# Altium PCB PCB 380.PcbDoc
Units mil, origin at the board's own origin, x right, y up, seen from the top; angles counter-clockwise.
Board outline 3250 x 4050 mil, 2 copper layers (Top Layer, Bottom Layer); 45 components, 47 nets, 207 pads, 18 vias.
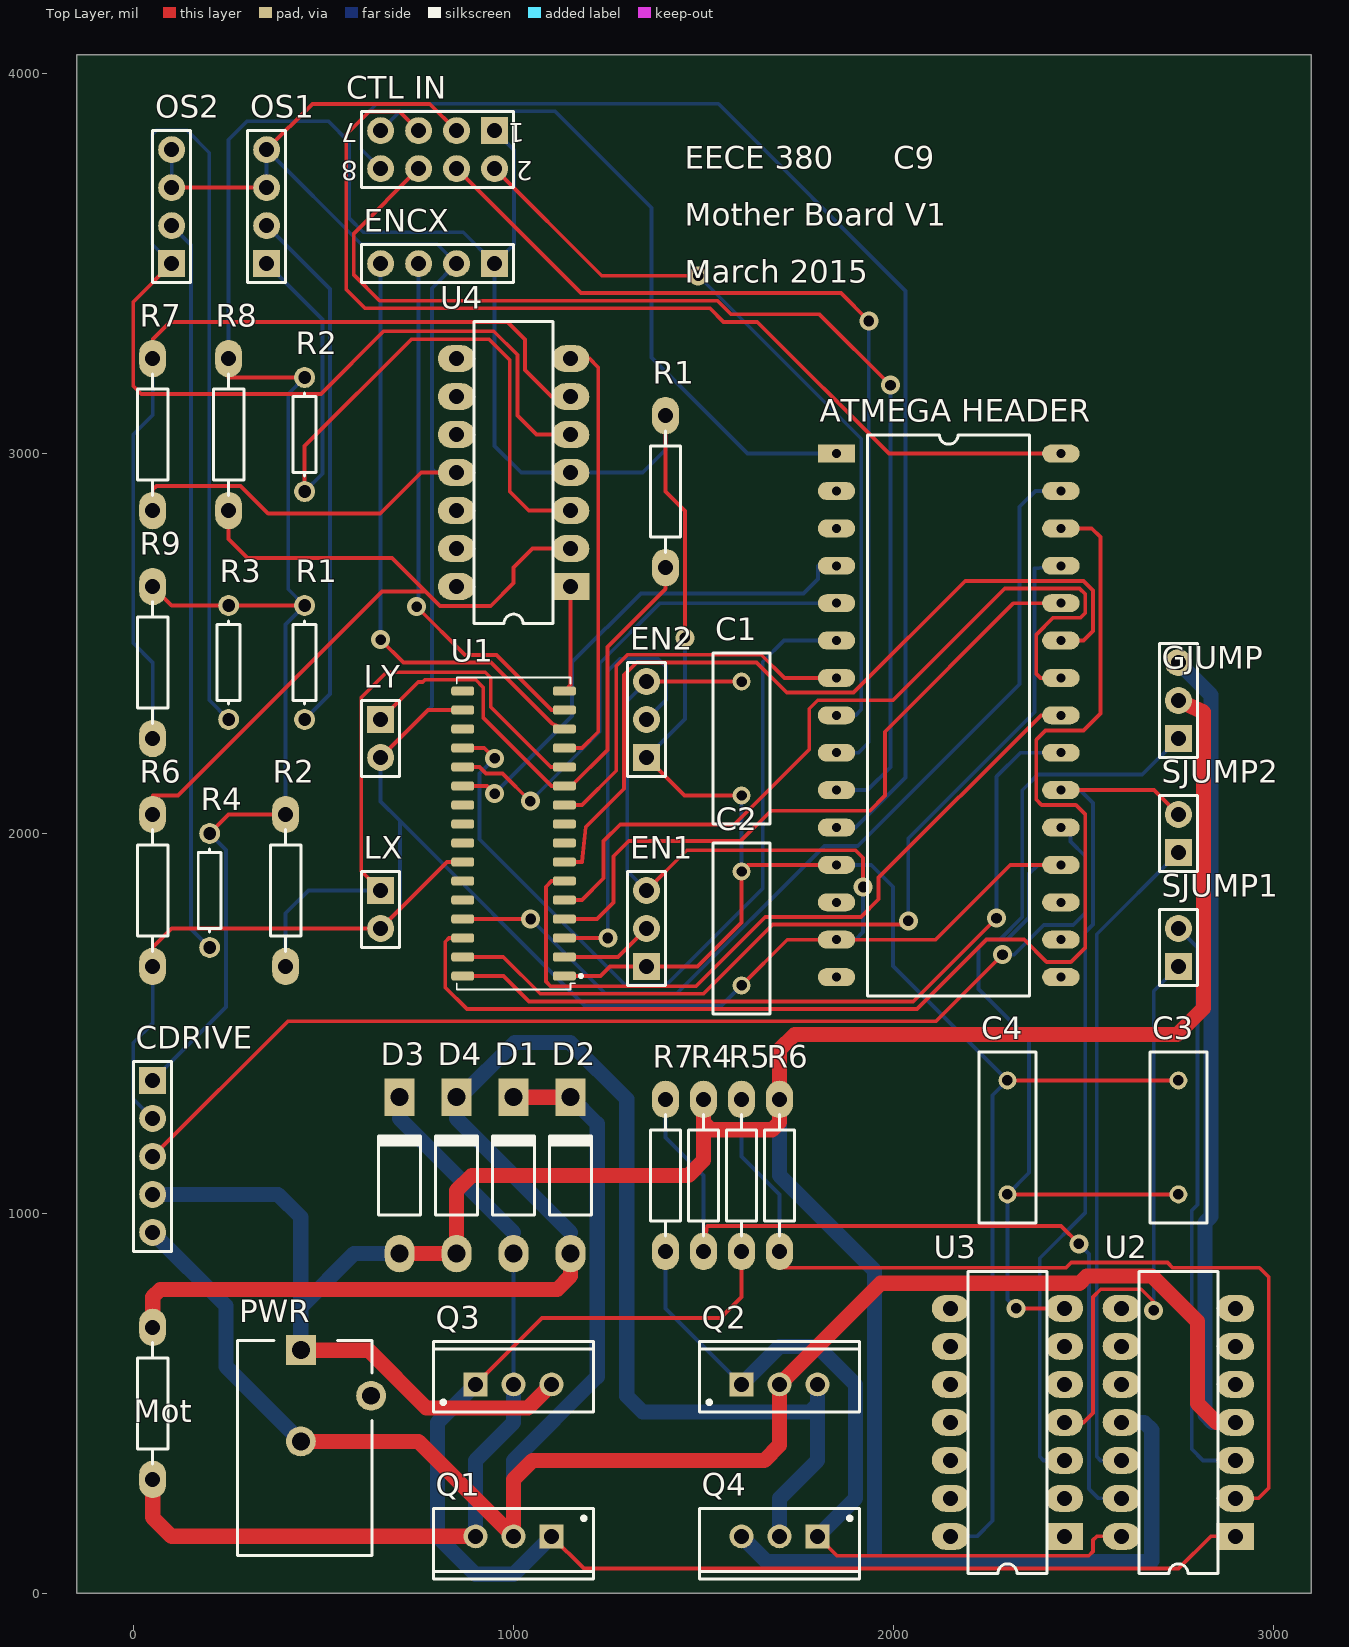
[diagram p0: Top Layer view]
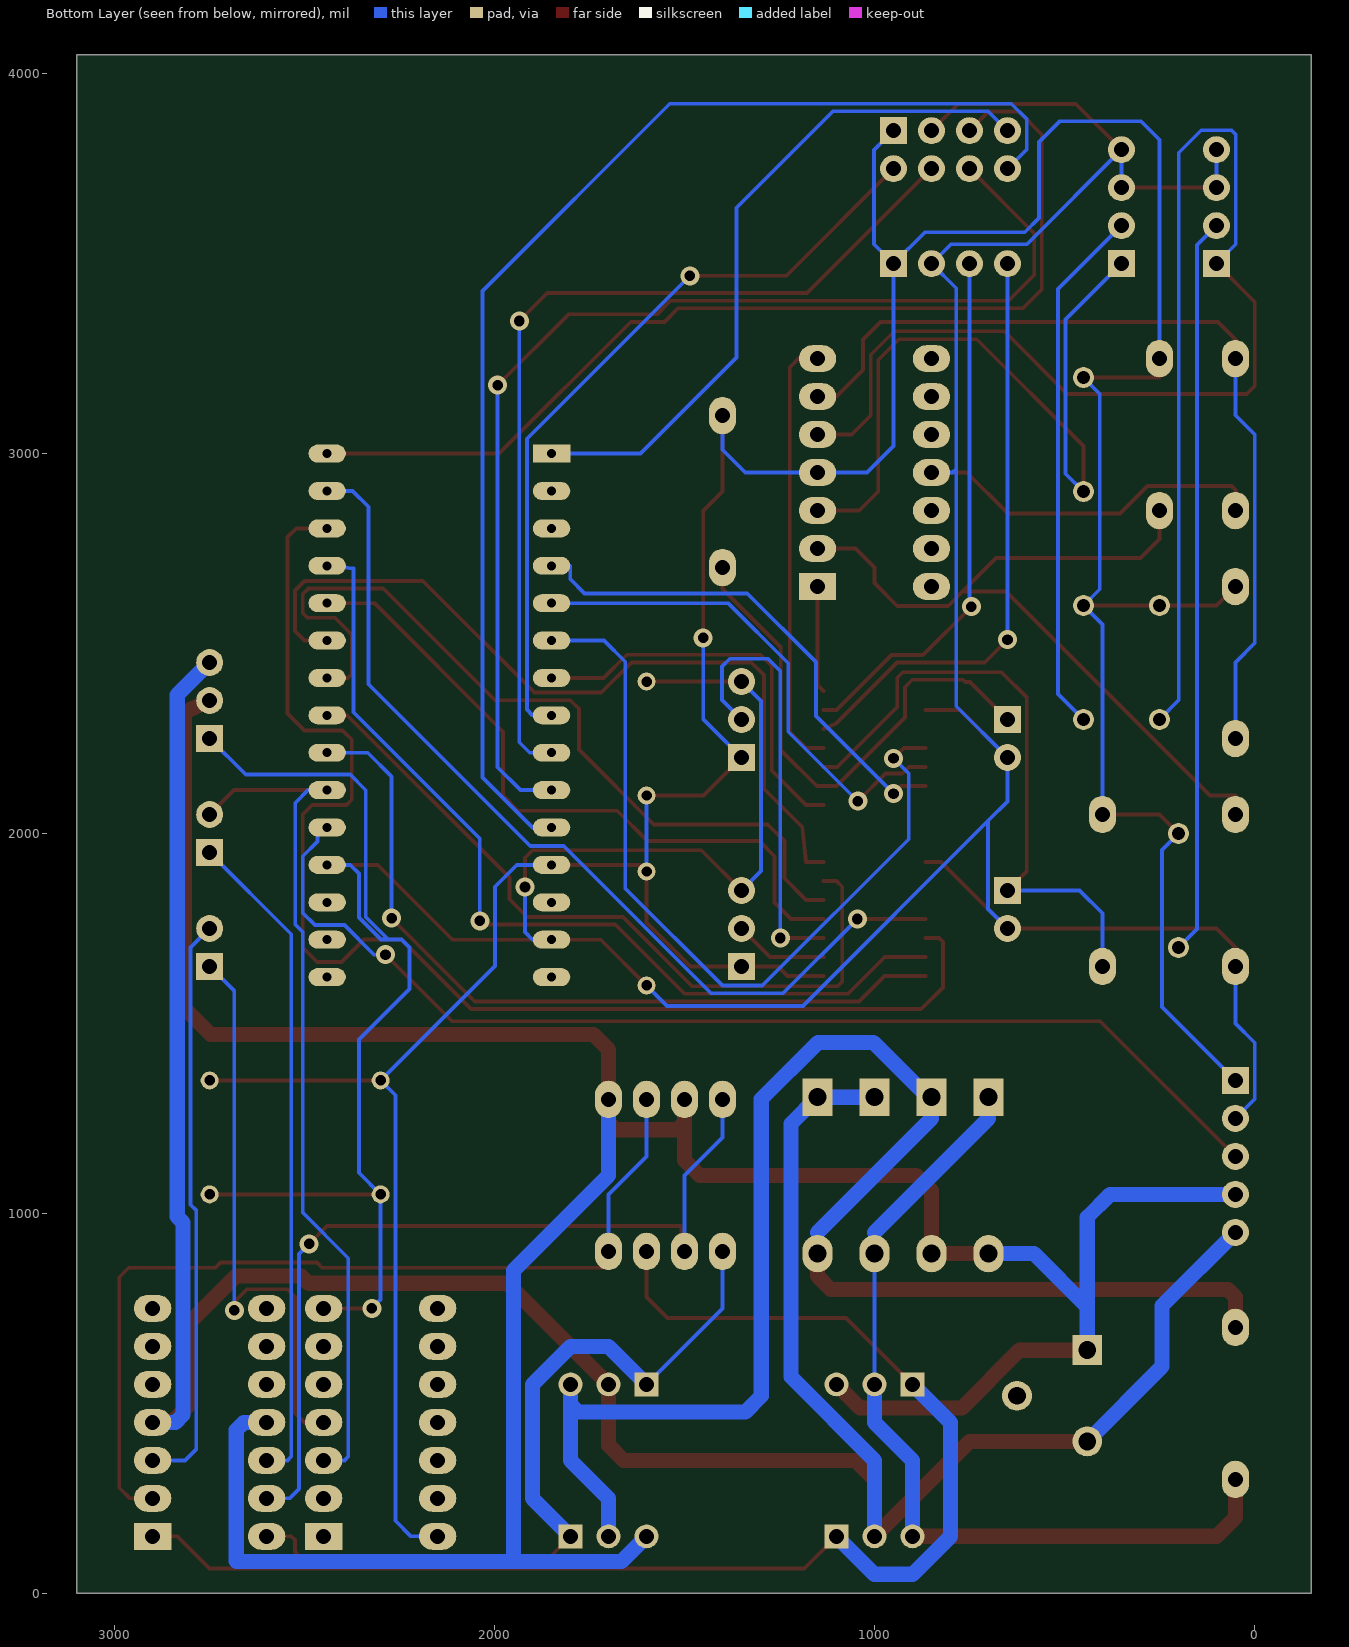
[diagram p1: Bottom Layer view, seen from below]

## Layer stack, top to bottom
Top Solder: solder mask 0.4, Solder Resist, Dk 3.5
Top Layer: signal copper 1.4
Dielectric1: dielectric 12.6, FR-4, Dk 4.8
Bottom Layer: signal copper 1.4
Bottom Solder: solder mask 0.4, Solder Resist, Dk 3.5

## Board outline
-150,0 -150,4050 3100,4050 3100,0

## Design rules (kind name [scope] priority, off if disabled: settings)
Clearance [All] p1: gap=10
FabricationTestPointUsage TestPointUsage [All] p1: valid=0 allowmultiple=FALSE
FabricationTestpoint Testpoint [All] p1: side=3 testpointundercomponent=TRUE minsize=40 maxsize=100 preferedsize=60 minholesize=0 maxholesize=40 preferedholesize=32 testpointgrid=1 allowsidetop=TRUE allowsidebottom=TRUE usegrid=TRUE gridtolerance=0.01
PolygonConnect [All] p1: connectstyle=Relief reliefconductorwidth=10 reliefentries=4 polygonreliefangle="90 Angle" airgapwidth=10
RoutingVias [All] p1: holewidth=28 width=50 viastyle="Through Hole" minholewidth=28 minwidth=50 maxholewidth=28 maxwidth=50
SilkToSolderMaskClearance SilkscreenOverComponentPads [IsPad] p1: minsilkscreentomaskgap=10 clearancetoexposedcopper=TRUE
SolderMaskExpansion [All] p1: expansion=4
UnpouredPolygon [All] p1: allowunpoured=FALSE
Width Width_POWER [(InNet('VPOWER')OR InNet('PGND') OR InNet('HV1') OR InNet('HV2')OR InNet('HV3')OR InNet('HV4')OR InNet('HV5')OR InNet('HV6')OR InNet('HV7')OR InNet('HV8')OR InNet('HV9')OR InNet('HV10')OR InNet('HV11')OR InNet('HV12')OR InNet('HV14')OR InNet('HV15')OR InNet('HV16')OR InNet('HV17')OR InNet('HV18')OR InNet('HV19')OR InNet('HV20') )] p1: maxlimit=60 minlimit=30 preferedwidth=40
Width [All] p2: maxlimit=10 minlimit=10 preferedwidth=10
26 further rules are at their usual default settings.

## Classes and differential pairs
component class "Optical Decoder Schematic": OS1 OS2 R1 R2 R3 R4 R6 R7 R8 R9 U4
component class motherboard: "ATMEGA HEADER" C1 C2 C3 C4 CDRIVE "CTL IN" EN1 EN2 ENCX LX LY PWR R1 R2 U1
component class "380 PCB Design": D1 D2 D3 D4 GJUMP Mot Q1 Q2 Q3 Q4 R4 R5 R6 R7 SJUMP1 SJUMP2 U2 U3

## Components (designator, comment, footprint, x,y, rotation, side; value= is the part's Value field where it differs from the comment)
"ATMEGA HEADER" "NanoHeader" DIP30WIDE 1850,3000 r0 top
C1 "" RAD-0.3 1600,2250 r270 top
C2 "" RAD-0.3 1600,1750 r90 top
C3 "" RAD-0.3 2750,1200 r90 top
C4 "" RAD-0.3 2300,1200 r90 top
CDRIVE "Commercial driver" HDR1X5_LGE1.0 50,1350 r270 top
"CTL IN" "To arm controller" HDR2X4_LGE1.0 950,3850 r180 top
D1 "1N4005" DO-41_XLGE1.2 1000,1100 r90 top
D2 "1N4005" DO-41_XLGE1.2 1150,1100 r90 top
D3 "1N4005" DO-41_XLGE1.2 700,1100 r90 top
D4 "1N4005" DO-41_XLGE1.2 850,1100 r90 top
EN1 "Jumper" HDR1X3_LGE1.0 1350,1650 r90 top
EN2 "Jumper" HDR1X3_LGE1.0 1350,2200 r90 top
ENCX "Encoder X" HDR1X4_LGE1.0 950,3500 r180 top
GJUMP "C-Hdr1x3" HDR1X3_LGE1.0 2750,2250 r90 top
LX "Limit switch X" HDR1X2_LGE1.0 650,1850 r270 top
LY "Limit switch Y" HDR1X2_LGE1.0 650,2300 r270 top
Mot "G-Res" Res10mm_LGE1.0 50,500 r90 top (schematic designator Motor2)
OS1 "C-Hdr1x4" HDR1X4_LGE1.0 350,3500 r90 top
OS2 "C-Hdr1x4" HDR1X4_LGE1.0 100,3500 r90 top
PWR "Power in" KLD_XLGE1.2 450,100 r90 top
Q1 "T-PChan3.3" TO-220AB 1000,150 r180 top
Q2 "T-PChan3.3" TO-220AB 1700,550 r0 top
Q3 "T-NChan3.3" TO-220AB 1000,550 r0 top
Q4 "T-NChan3.3" TO-220AB 1700,150 r180 top
R1 "" Res10mm_LGE1.0 1400,2900 r90 top
R1 "220" AXIAL-0.3 450,2450 r90 top
R2 "" Res10mm_LGE1.0 400,1850 r90 top
R2 "10K" AXIAL-0.3 450,3050 r90 top
R3 "10K" AXIAL-0.3 250,2450 r90 top
R4 "1K" Res10mm_LGE1.0 1500,1100 r90 top
R4 "220" AXIAL-0.3 200,1850 r90 top
R5 "1K" Res10mm_LGE1.0 1600,1100 r90 top
R6 "1K" Res10mm_LGE1.0 1700,1100 r90 top
R6 "200K" Res10mm_LGE1.0 50,1850 r90 top
R7 "1K" Res10mm_LGE1.0 1400,1100 r90 top
R7 "200K" Res10mm_LGE1.0 50,3050 r90 top
R8 "235K" Res10mm_LGE1.0 250,3050 r90 top
R9 "235K" Res10mm_LGE1.0 50,2450 r90 top
SJUMP1 "C-Hdr1x2" HDR1X2_LGE1.0 2750,1650 r90 top
SJUMP2 "C-Hdr1x2" HDR1X2_LGE1.0 2750,1950 r90 top
U1 "HCTL2032" SOIC50P295X100-32L16N 1000,2000 r90 top
U2 "O-OpAmp324" DIP14_LGE1.0 2750,450 r90 top
U3 "D-Not" DIP14_LGE1.0 2300,450 r90 top
U4 "O-OpAmp074" DIP14_LGE1.0 1000,2950 r90 top

## Footprints (in the part's own frame and the unit in brackets; to place one, negate y for a bottom-side part, rotate by r counter-clockwise, add the part's x,y. Pads: shape width x height; smd on the part's side, far side on the other; paste and mask are expansions set on the pad)
AXIAL-0.3 [mm] "Axial Device, Thru-Hole; 2 Leads; 0.3 in Pin Spacing"
  round 1.4 hole 0.85: 1(-3.81,0) 2(3.81,0)
  silkscreen extent -2.77,-0.76 2.77,0.76
DIP14_LGE1.0 [mm] "DIP; 14 Leads; Row Spacing 7.62 mm; Pitch 2.54 mm"
  rect 1.8x2.5 hole 1: 1(-7.62,-3.81)
  oval 1.8x2.5 hole 1: 2(-5.08,-3.81) 3(-2.54,-3.81) 4(0,-3.81) 5(2.54,-3.81) 6(5.08,-3.81) 7(7.62,-3.81) 8(7.62,3.81) 9(5.08,3.81) 10(2.54,3.81) 11(0,3.81) 12(-2.54,3.81) 13(-5.08,3.81) 14(-7.62,3.81)
  silkscreen extent -10.1,-2.65 10.1,2.65
DIP30WIDE [mm]
  rect 2.5x1.2 hole 0.6: 1(0,0)
  oval 2.5x1.2 hole 0.6: 2(0,-2.5) 3(0,-5) 4(0,-7.5) 5(0,-10) 6(0,-12.5) 7(0,-15) 8(0,-17.5) 9(0,-20) 10(0,-22.5) 11(0,-25) 12(0,-27.5) 13(0,-30) 14(0,-32.5) 15(0,-35) 16(15,-35) 17(15,-32.5) 18(15,-30) 19(15,-27.5) 20(15,-25) 21(15,-22.5) 22(15,-20) 23(15,-17.5) 24(15,-15) 25(15,-12.5) 26(15,-10) 27(15,-7.5) 28(15,-5) 29(15,-2.5) 30(15,0)
  silkscreen extent 2.08,-36.25 12.91,1.25
DO-41_XLGE1.2 [mm] "Diode, Axial; Body 5.2 x 2.7 mm (LxDia. max), Lead Dia. 0.86 mm (max)"
  oval 2.5x2 hole 1.2: 1(-5.23,0)
  rect 2.5x2 hole 1.2: 2(5.23,0)
  silkscreen extent -2.65,-1.4 2.75,1.4
HDR1X2_LGE1.0 [mm] "Connector; Header; 2 Position"
  rect 1.8x1.8 hole 1: 1(0,0)
  round 1.8 hole 1: 2(2.54,0)
  silkscreen extent -1.27,-1.27 3.81,1.27
HDR1X3_LGE1.0 [mm] "Connector; Header; 4 Position"
  rect 1.8x1.8 hole 1: 1(0,0)
  round 1.8 hole 1: 2(2.54,0) 3(5.08,0)
  silkscreen extent -1.27,-1.27 6.35,1.27
HDR1X4_LGE1.0 [mm] "Connector; Header; 4 Position"
  rect 1.8x1.8 hole 1: 1(0,0)
  round 1.8 hole 1: 2(2.54,0) 3(5.08,0) 4(7.62,0)
  silkscreen extent -1.27,-1.27 8.89,1.27
HDR1X5_LGE1.0 [mm] "Connector; Header; 6 Position"
  rect 1.8x1.8 hole 1: 1(0,0)
  round 1.8 hole 1: 2(2.54,0) 3(5.08,0) 4(7.62,0) 5(10.16,0)
  silkscreen extent -1.27,-1.27 11.43,1.27
HDR2X4_LGE1.0 [mm] "Connector; Header; 4x2 Position"
  rect 1.8x1.8 hole 1: 1(0,0)
  round 1.8 hole 1: 2(0,2.54) 3(2.54,0) 4(2.54,2.54) 5(5.08,0) 6(5.08,2.54) 7(7.62,0) 8(7.62,2.54)
  silkscreen extent -1.27,-1.27 8.89,3.81
KLD_XLGE1.2 [mm] "DC Power Jack, PCB Mount"
  rect 2x2 hole 1.2: 1(13.716,0.254)
  round 2 hole 1.2: 2(7.62,0.254) 3(10.668,-4.445)
  silkscreen extent 0,-4.5 14.35,4.5
RAD-0.3 [mm] "Radial Cap, Thru-Hole; 2 Leads; 0.3 in Pin Spacing"
  round 1.2 hole 0.7: 1(-3.81,0) 2(3.81,0)
  silkscreen extent -5.71,-1.91 5.71,1.91
Res10mm_LGE1.0 [mm] "Axial Device, Thru-Hole; 2 Leads; 0.4 in Pin Spacing"
  oval 2.5x1.8 hole 1: 1(-5.08,0) 2(5.08,0)
  silkscreen extent -4.06,-1.02 4.06,1.02
SOIC50P295X100-32L16N [mil] "Small Outline IC (SOIC), 0.050 in pitch;32 pin,0.816 in L X 0.296 in W X 0.100 in H body"
  rrect50% 23.48x60.53 smd: 1(-375,-133.89) 2(-325,-133.89) 3(-275,-133.89) 4(-225,-133.89) 5(-175,-133.89) 6(-125,-133.89) 7(-75,-133.89) 8(-25,-133.89) 9(25,-133.89) 10(75,-133.89) 11(125,-133.89) 12(175,-133.89) 13(225,-133.89) 14(275,-133.89) 15(325,-133.89) 16(375,-133.89) 17(375,133.89) 18(325,133.89) 19(275,133.89) 20(225,133.89) 21(175,133.89) 22(125,133.89) 23(75,133.89) 24(25,133.89) 25(-25,133.89) 26(-75,133.89) 27(-125,133.89) 28(-175,133.89) 29(-225,133.89) 30(-275,133.89) 31(-325,133.89) 32(-375,133.89)
  silkscreen extent -411,-181 411,150
TO-220AB [mm] "TO, Thru-Hole, Vertical, Heatsink Mounted; 3 In-Line Leads; Pitch 2.54 mm"
  rect 1.6x1.6 hole 1: 1(-2.54,0)
  round 1.6 hole 1: 2(0,0) 3(2.54,0)
  silkscreen extent -5.35,-1.85 5.35,2.85, body extent -5.4,-1.9 5.4,2.9, height 19.3

## Part data
C1 C2 C3 C4: library part Cap, "Capacitor"
CDRIVE: library part C-Hdr1x5, "Header, 6-Pin"
"CTL IN": library part C-Hdr2x4, "Header, 4-Pin, Dual row"
D1 D2 D3 D4: library part T-Diode-1N4005, "diode"
EN1 EN2: library part C-Hdr1x3, "Header, 4-Pin"
ENCX: library part C-Hdr1x4, "Header, 4-Pin"
GJUMP OS1 OS2: "Header, 4-Pin"
LX LY: library part C-Hdr1x2, "Header, 2-Pin"
Mot: "resistor (specify value)"
PWR: "Low Voltage Power Supply Connector"
Q1 Q2: "P-Channel Power MOSFET"
Q3 Q4: "N-Channel Power MOSFET"
R1 R2 R4 R5 R6 R6 R7 R7 R8 R9: library part G-Res, "resistor (specify value)"
R1 R2 R3 R4: library part Res1, "Resistor"
SJUMP1 SJUMP2: "Header, 2-Pin"
U2: "quad op-amp"
U3: "hex NOT gate (inverter)"
U4: "op amp (TL074)"

## Via types
v1: diameter 50, hole 28, Top Layer to Bottom Layer, 18 vias

## Nets (pads, with @x,y where several pads share a name; then routed paths per layer and width w, separated by ;. In a path a pad name is that pad's centre, name@x,y a point inside that pad or via, vN(x,y) a via of type N, cw(c..) or ccw(c..) an arc to the next point about the centre after c; other vN are vias at no path point)
ALT1: "ATMEGA HEADER.30" "CTL IN.5" | length 2704.4
  Top Layer w10: 750,3850 699.57,3900.43 620,3900.43 559.57,3840 559.57,3431.82 608.89,3382.5 1516.92,3382.5 1552.89,3346.53 1641.47,3346.53 1988,3000 2440.55,3000
ALT2: "ATMEGA HEADER.1" "CTL IN.7" | length 1825.1
  Bottom Layer w10: 650,3850 701,3901 1109,3901 1363,3647 1363,3253 1616,3000 1850,3000
BYTE: "ATMEGA HEADER.23" U1.6 | length 1994.3
  Top Layer w10: U1.6 1100,1875 1085,1860 1085,1610 1097,1598 1480,1598 1662.28,1780.28 1914.21,1780.28 1960.82,1826.89 1960.82,1883.85 2388,2311.02 2440.55,2311.02
CHAX: ENCX.3 U1.15 | length 1406.6
  Top Layer w10: v1(745,2597) 871.93,2470.07 954.93,2470.07 1100,2325 U1.15
  Bottom Layer w10: v1(745,2597) 750,2602 ENCX.3
CHAY: U1.16 U4.1 | length 281.7
  Top Layer w10: U1.16 1150,2391.11 U4.1
CHBX: ENCX.4 U1.14 | length 1568.2
  Top Layer w10: v1(650,2510) 709.93,2450.07 940.43,2450.07 1099.93,2290.57 U1.14
  Bottom Layer w10: v1(650,2510) ENCX.4
CHBY: U1.13 U4.7 | length 1148.5
  Top Layer w10: U1.13 1180,2225 1223,2268 1223,3227 1200,3250 U4.7
CLOCK: "ATMEGA HEADER.24" U1.5 | length 2211.7
  Top Layer w10: U1.5 1180,1825 1237,1882 1237,1980 1281,2024 1581,2024 1778.17,2221.17 1778.17,2328.17 1800.82,2350.82 1998.82,2350.82 2293,2645 2490,2645 2504.77,2630.23 2504.77,2580 2492.44,2567.68 2420,2567.68 2376,2523.68 2376,2420 2386.55,2409.45 2440.55,2409.45
D0: "ATMEGA HEADER.26" U1.4 | length 1820.9
  Top Layer w10: U1.4 1220,1775 1263,1818 1263,1940 1303,1980 1597.24,1980 1677.24,2060 1938,2060 1978,2100 1978,2268 2316.3,2606.3 2440.55,2606.3
D1: "ATMEGA HEADER.27" U1.31 | length 2427.7
  Top Layer w10: U1.31 973,1675 1070,1578 1500,1578 1682.28,1760.28 2029.28,1760.28 v1(2039,1770)
  Bottom Layer w10: v1(2039,1770) 2039,1987 2371,2319 2371,2697.72 2440.55,2704.72
D2: "ATMEGA HEADER.28" U1.30 | length 3423.8
  Top Layer w10: U1.30 830,1725 820,1715 820,1595 877,1538 2062,1538 2245,1721 2344,1721 2403.15,1661.85 2466.85,1661.85 2505,1700 2505,2050 2480,2075 2390,2075 2376,2089 2376,2247 2400,2271 2500,2271 2545,2316 2545,2780.15 2522,2803.15 2440.55,2803.15
D3: "ATMEGA HEADER.29" U1.29 | length 2476.6
  Top Layer w10: U1.29 v1(1045,1775)
  Bottom Layer w10: v1(1045,1775) 1240.43,1579.57 1430.57,1579.57 1818,1967 1906.05,1967 2332,2392.95 2332,2860 2373.57,2901.57 2440.55,2901.57
D4: "ATMEGA HEADER.4" U1.22 | length 1344.1
  Top Layer w10: U1.22 930,2125 v1(950,2105)
  Bottom Layer w10: v1(950,2105) 1154,2309 1154,2451 1335,2632 1763,2632 1801,2670 1801,2704.72 1850,2704.72
D5: "ATMEGA HEADER.5" U1.21 | length 1342.5
  Top Layer w10: U1.21 910,2175 927,2158 971,2158 v1(1044,2085)
  Bottom Layer w10: v1(1044,2085) 1227,2268 1227,2448 1385.3,2606.3 1850,2606.3
D6: "ATMEGA HEADER.6" U1.20 | length 2150.1
  Top Layer w10: U1.20 923,2225 v1(950,2198)
  Bottom Layer w10: v1(950,2198) 910,2158 910,1985 1295.43,1599.57 1400.43,1599.57 1656,1855.13 1656,2451.87 1712,2507.87 1850,2507.87
D7: "ATMEGA HEADER.7" U1.10 | length 1066.5
  Top Layer w10: U1.10 1180,2075 1270.18,2165.18 1270.18,2440.62 1300,2470.43 1652.01,2470.43 1713,2409.45 1850,2409.45
DGND: "ATMEGA HEADER.14" "ATMEGA HEADER.19" "CTL IN.3" C1.1 C2.1 C3.1 C4.1 CDRIVE.2 EN1.3 EN2.3 ENCX.2 GJUMP.1 LX.2 LY.2 OS1.3 OS1.4 OS2.3 OS2.4 R6.1@50,1650 R7.1@50,2850 U1.18 U1.26 U3.7 U4.11 | length 12908.7
  Top Layer w10: R6.1@50,1650 50,1700 100,1750 LX.2 825,1925 U1.26 ; R7.1@50,2850 50,2905 60,2915 281,2915 354,2842 649,2842 757,2950 U4.11 ; OS2.3 OS1.3 ; OS1.4 470.43,3920.43 779.57,3920.43 850,3850 ; LY.2 775,2325 U1.18 ; EN1.3 1456,1956 1900,1956 1920,1936 v1(1920,1859) ; EN2.3 C1.1 ; C2.1 1720.47,1720.47 1850,1720.47 2110.47,1720.47 2307.32,1917.32 2440.55,1917.32 ; C4.1 C3.1 ; v1(2323,750) U3.7
  Bottom Layer w10: CDRIVE.2 -1,1301 -1,1449 50,1500 R6.1@50,1650 ; OS2.3 OS2.4 ; OS1.3 OS1.4 599,3551 799,3551 ENCX.2 785,3435 785,2960 ; LX.2 701,1801 701,2033.39 ; U4.11 795,2950 785,2960 ; EN1.3 1299,1901 1299,2349 EN2.3 ; C2.1 1546,1546 1188.39,1546 701,2033.39 ; 1850,1720.47 1900,1720.47 1920,1740.47 v1(1920,1859) ; v1(2323,750) 2300,773 C4.1 2357,1107 2357,1457.99 2224,1590.99 2224,1700 2245,1721 2280,1721 ; 2440.55,1917.32 2380,1917.32 2357,1894.32 2357,1779.1 2298.9,1721 2280,1721 ; GJUMP.1 2655,2155 2380,2155 2339,2114 2339,1780 2280,1721 ; 701,2033.39 650,2084.39 LY.2 785,2335 785,2960
ENABLE: "ATMEGA HEADER.25" U1.7 | length 2195.5
  Top Layer w10: U1.7 1180,1925 1190,2017 1291,2118 1291,2417 1324.43,2450.43 1639.57,2450.43 1719.18,2370.82 1894.82,2370.82 2189,2665 2500,2665 2525,2640 2525,2532.87 2500,2507.87 2440.55,2507.87
"M1 SERIAL": "ATMEGA HEADER.20" CDRIVE.3 | length 2986.7
  Top Layer w10: CDRIVE.3 406,1506 2112,1506 v1(2287,1681)
  Bottom Layer w10: v1(2287,1681) 2317.34,1681 2395.43,1759.1 2473.1,1759.1 2504.77,1790.77 2504.77,1940.23 2466,1979 2466,2015.75 2440.55,2015.75
"M2 PWM": "ATMEGA HEADER.21" SJUMP2.2 U3.3 | length 2281.6
  Top Layer w10: 2440.55,2114.17 2685.83,2114.17 SJUMP2.2
  Bottom Layer w10: 2440.55,2114.17 2490.83,2114.17 2524.77,2080.23 2524.77,1760.27 2505,1740.51 2505,1002 2385,882 2385,360 2395,350 U3.3
"NetATMEGA HEADER_8": "ATMEGA HEADER.8" "CTL IN.2" | length 2043.7
  Top Layer w10: 950,3750 1232,3468 v1(1486,3468)
  Bottom Layer w10: v1(1486,3468) 1915,3039 1915,2326.02 1900,2311.02 1850,2311.02
"NetATMEGA HEADER_9": "ATMEGA HEADER.9" "CTL IN.4" | length 2456.4
  Top Layer w10: 850,3750 1177.5,3422.5 1861.5,3422.5 v1(1935,3349)
  Bottom Layer w10: 1850,2212.6 1907.6,2212.6 1935,2240 v1(1935,3349)
"NetATMEGA HEADER_10": "ATMEGA HEADER.10" "CTL IN.6" | length 3055.6
  Top Layer w10: 750,3750 579.57,3579.57 579.57,3470.43 647.5,3402.5 1536.92,3402.5 1572.89,3366.53 1805.47,3366.53 v1(1992,3180)
  Bottom Layer w10: 1850,2114.17 1932,2114.17 1992,2174.17 v1(1992,3180)
"NetATMEGA HEADER_11": "ATMEGA HEADER.11" "CTL IN.8" | length 3322.2
  Bottom Layer w10: 650,3750 599,3801 599,3880 640,3921 1539,3921 2032,3428 2032,2147.75 1900,2015.75 1850,2015.75
NetD1_1: D1.1 D3.2 Mot.1 Q1.3 Q3.2 | length 2292.3
  Top Layer w40: Mot.1 50,200 100,150 Q1.3
  Bottom Layer w10: 700,1250 D3.2 ; Q3.2 D1.1 1000,950
  Bottom Layer w40: 700,1250 1000,950 ; Q1.3 900,350 1000,450 Q3.2
NetD2_1: D2.1 D4.2 Mot.2 Q2.3 Q4.2 | length 4118.5
  Top Layer w40: Mot.2 50,780 70,800 1115,800 1150,835 D2.1
  Bottom Layer w10: 850,1250 D4.2 D4.2@859,1305.91 ; D2.1 1150,950
  Bottom Layer w40: 850,1250 1150,950 ; D4.2@859,1305.91 1003.09,1450 1149,1450 1298,1301 1298,519 1340,477 1780,477 1800,497 ; Q4.2 1700,250 1800,350 1800,497 ; Q2.3 1800,497
NetEN1_2: EN1.2 U1.2 | length 247.2
  Top Layer w10: U1.2 1275,1675 EN1.2
NetEN2_2: EN2.2 U1.3 | length 1152.8
  Top Layer w10: U1.3 v1(1248,1725)
  Bottom Layer w10: v1(1248,1725) 1248,2428 1280,2460 1381,2460 1401,2440 1401,2351 EN2.2
NetLX_1: LX.1 R2.1@400,1650 U1.12 | length 1654.9
  Top Layer w10: LX.1 599,1901 599,2358 665.53,2424.53 925.54,2424.53 939.93,2410.14 939.93,2333.07 1098,2175 U1.12
  Bottom Layer w10: R2.1@400,1650 400,1790 460,1850 LX.1
NetLY_1: LY.1 R1.1@1400,2700 U1.11 | length 1385.7
  Top Layer w10: LY.1 749,2399 761,2399 766.53,2404.53 900.43,2404.53 919.93,2385.03 919.93,2305.07 1100,2125 U1.11 1152,2125 1247,2220 1247,2491 1400,2644 R1.1@1400,2700
NetOS1_1: OS1.1 R2.1@450,2900 U4.3 | length 2006.4
  Top Layer w10: R2.1@450,2900 450,3020 731,3301 935.19,3301 990,3246.19 990,2900 1040,2850 U4.3
  Bottom Layer w10: OS1.1 497,3353 497,2947 R2.1@450,2900
NetOS1_2: OS1.2 R1.1@450,2300 | length 1396.9
  Bottom Layer w10: OS1.2 517,3433 517,2367 R1.1@450,2300
NetOS2_1: OS2.1 R3.1 U4.5 | length 3851.5
  Top Layer w10: OS2.1 -1,3399 -1,3178 20,3157 493,3157 658,3322 948,3322 1010,3260 1010,3100 1060,3050 U4.5
  Bottom Layer w10: OS2.1 49,3551 49,3840 60,3851 140,3851 199,3792 199,2351 R3.1
NetOS2_2: OS2.2 R4.1@200,1700 | length 1941.4
  Bottom Layer w10: OS2.2 151,3549 151,1749 R4.1@200,1700
NetQ1_1: Q1.1 Q3.1 R5.1 U2.1 | length 3609.9
  Top Layer w10: Q3.1 1075,725 1545,725 1600,780 R5.1 ; Q1.1 1185,65 2750,65 2835,150 U2.1
  Bottom Layer w40: Q3.1 800,450 800,150 900,50 1000,50 Q1.1
NetQ2_1: Q2.1 Q4.1 R7.1@1400,900 U2.14 | length 2116.9
  Top Layer w10: Q4.1 1851,99 2514,99 2525,110 2525,140 2535,150 U2.14
  Bottom Layer w10: R7.1@1400,900 1400,750 Q2.1
  Bottom Layer w40: Q2.1 1700,650 1800,650 1900,550 1900,250 Q4.1
NetR4_1: R4.1@1500,900 R7.2@1400,1300 U2.13 | length 2258.2
  Top Layer w10: R4.1@1500,900 1510,967 2441,967 v1(2488,920)
  Bottom Layer w10: R7.2@1400,1300 1400,1200 1500,1100 R4.1@1500,900 ; v1(2488,920) 2515,893 2515,275 2540,250 U2.13
NetR5_2: R5.2 R6.1@1700,900 U2.2 | length 2447.5
  Top Layer w10: R6.1@1700,900 1700,857 2454.38,857 2467.81,870.43 2721.14,870.43 2734.57,857 2963,857 2988,832 2988,278 2960,250 U2.2
  Bottom Layer w10: R5.2 1600,1150 1700,1050 R6.1@1700,900
NetR6_2: R6.2@50,2050 R8.1 U4.2 | length 2124.9
  Top Layer w10: R6.2@50,2050 50,2100 117,2100 654,2637 768,2637 ; R8.1 250,2775 300,2725 680,2725 768,2637 ; U4.2 1050,2750 1000,2700 1000,2659 940,2599 806,2599 768,2637
NetR7_2: R7.2@50,3250 R9.1 U4.6 | length 2339.4
  Top Layer w10: R7.2@50,3250 50,3300 96,3346 984,3346 1030,3300 1030,3220 1100,3150 U4.6
  Bottom Layer w10: R9.1 50,2450 -1,2501 -1,3050 50,3101 R7.2@50,3250
NetSJUMP1_1: SJUMP1.1 U3.4 | length 1526.8
  Top Layer w10: U3.4 2500,450 2525,475 2525,780 2545.43,800.43 2652,800.43 2685,767.43 v1(2685,745)
  Bottom Layer w10: v1(2685,745) 2685,1585 SJUMP1.1
NetSJUMP1_2: SJUMP1.2 U2.3 | length 1524.7
  Bottom Layer w10: SJUMP1.2 2800.43,1699.57 2800.43,1022.81 2785,1007.38 2785,380 2815,350 U2.3
NetSJUMP2_1: SJUMP2.1 U2.12 | length 1748.2
  Bottom Layer w10: U2.12 2545,350 2535,360 2535,1735 SJUMP2.1
PGND: CDRIVE.4 D3.1 D4.1 GJUMP.2 PWR.1 Q3.3 Q4.3 R4.2@1500,1300 R6.2@1700,1300 U2.11 | length 8272.3
  Top Layer w40: PWR.1 618,640 770,488 1038,488 Q3.3 ; D3.1 D4.1 850,1060 890,1100 1460,1100 1500,1140 1500,1240 ; R4.2@1500,1300 1500,1240 ; GJUMP.2 2816,2320 2816,1540 2747,1471 1740,1471 1700,1431 1700,1300 1700,1240 1680,1220 1520,1220 1500,1240
  Bottom Layer w40: CDRIVE.4 380,1050 440,990 440,754.09 ; PWR.1 440,754.09 ; D3.1 580,894.09 440,754.09 ; Q4.3 1666,84 2679,84 2680,85 2680,430 2660,450 U2.11 ; R6.2@1700,1300 1700,1100 1950,850 1950,84
"SEL X/Y": "ATMEGA HEADER.22" U1.32 | length 2091.6
  Top Layer w10: U1.32 973.74,1625 1040.74,1558 2052,1558 v1(2271,1777)
  Bottom Layer w10: v1(2271,1777) 2271,2149.6 2334,2212.6 2440.55,2212.6
VCC: "ATMEGA HEADER.12" "CTL IN.1" C1.2 C2.2 C3.2 C4.2 CDRIVE.1 EN1.1 EN2.1 ENCX.1 R1.2 R2.2 R3.2 R4.2@200,2000 R8.2 R9.2 U1.1 U3.14 U4.4 | length 10811
  Top Layer w10: R9.2 100,2600 R3.2 R1.2@450,2600 ; R4.2@200,2000 250,2050 R2.2@400,2050 ; R8.2 250,3200 R2.2@450,3200 ; U1.1 1229,1625 1254,1650 EN1.1 1484,1650 1600,1766 C2.2 1617.32,1917.32 1850,1917.32 ; EN2.1 1450,2100 C1.2 ; R1.2@1400,3100 1400,2900 1451,2849 v1(1451,2515) ; C4.2 C3.2
  Bottom Layer w10: CDRIVE.1 243,1543 243,1957 R4.2@200,2000 ; R8.2 250,3826 299,3875 512,3875 567,3820 567,3620 604.33,3582.67 867.33,3582.67 ENCX.1 ; R2.2@400,2050 400,2550 450,2600 407,2643 407,3157 R2.2@450,3200 ; 950,3850 1001,3799 1001,3551 ENCX.1 ; EN2.1 1451,2301 v1(1451,2515) ; R1.2@1400,3100 1400,3010 1340,2950 U4.4 1020,2950 950,3020 ENCX.1 ; C2.2 C1.2 ; 1850,1917.32 1941.68,1917.32 1999,1860 1999,1651 C4.2 2261,1311 2261,191 2220,150 U3.14
VPOWER: CDRIVE.5 D1.2 D2.2 GJUMP.3 PWR.2 Q1.2 Q2.2 U2.4 | length 7712.9
  Top Layer w40: PWR.2 750,400 Q1.2 1000,300 1050,350 1660,350 1700,390 Q2.2 1966,816 2489.38,816 2508.81,835.43 2680.57,835.43 2800,716 2800,500 2850,450 U2.4 ; D1.2 D2.2
  Bottom Layer w40: CDRIVE.5 243,757 243,597 PWR.2 ; Q1.2 1000,350 1220,570 1220,1235.91 D2.2 D1.2 ; GJUMP.3 2835.43,2364.57 2835.43,991.81 2820,976.38 2820,470 2840,450 U2.4
pads on no net: "ATMEGA HEADER.2" "ATMEGA HEADER.3" "ATMEGA HEADER.13" "ATMEGA HEADER.15" "ATMEGA HEADER.16" "ATMEGA HEADER.17" "ATMEGA HEADER.18" PWR.3 U1.8 U1.9 U1.17 U1.19 U1.23 U1.24 U1.25 U1.27 U1.28 U2.5 U2.6 U2.7 U2.8 U2.9 U2.10 U3.1 U3.2 U3.5 U3.6 U3.8 U3.9 U3.10 U3.11 U3.12 U3.13 U4.8 U4.9 U4.10 U4.12 U4.13 U4.14

## Silkscreen, mask and mechanical layers (free items; w line width, h text height)
Top Overlay:
  text "EECE 380" at 1450,3750 h60
  text "C9" at 2000,3750 h60
  text "Mother Board V1" at 1450,3600 h60
  text "March 2015" at 1450,3450 h60
Mechanical 16:
  drawing of 1872 lines, arcs and shapes, not listed
  text "1" at -207.66,4745 h70
  text "2" at 2150.35,4745 h70
  text "3" at 4527,4745 h70
  text "4" at 6902.35,4745 h70
  text "A" at -1305,3855 h70
  text "B" at -1305,1979 h70
  text "C" at -1305,103 h70
  text "ENGINEER:" at 3470,-1320 h45
  text "TITLE:" at 4970,-1320 h45
  text "PCB DESIGNER:" at 3470,-1615 h45
  text "D" at -1305,-1769 h70
  text "D" at 7990,-1769 h70
  text "DATE:" at 3470,-1920 h45
  text "PART NO.:" at 4970,-1920 h45
  text "REV:" at 7070,-1920 h45
  text "Altium Limited" at 2170,-2020 h70
  text ".PRINT_DATE" at 3520,-2040 h70
  text "12a Rodborough Rd" at 2170,-2120 h70
  text "Frenchs Forest" at 2170,-2220 h70
  text "FILE NAME:" at 3470,-2220 h45
  text "DWG NO:" at 4970,-2220 h45
  text "SCALE:" at 7070,-2220 h45
  text "NSW 2086" at 2170,-2320 h70
  text ".PCB_FILE_NAME_NO_PATH" at 3520,-2340 h70
  text "1" at -207.66,-2555 h70
  text "2" at 2150.35,-2555 h70
  text "3" at 4527,-2555 h70
  text "4" at 6902.35,-2555 h70

## Text inside footprints (layer, text, board x,y; h text height)
"CTL IN": Top Overlay "2" at 1050,3770 h50 r180; Top Overlay "1" at 1030,3870 h50 r180; Top Overlay "7" at 590,3870 h50 r180; Top Overlay "8" at 590,3770 h50 r180